# EAGLE board reader (EAGLE 7.1.0)
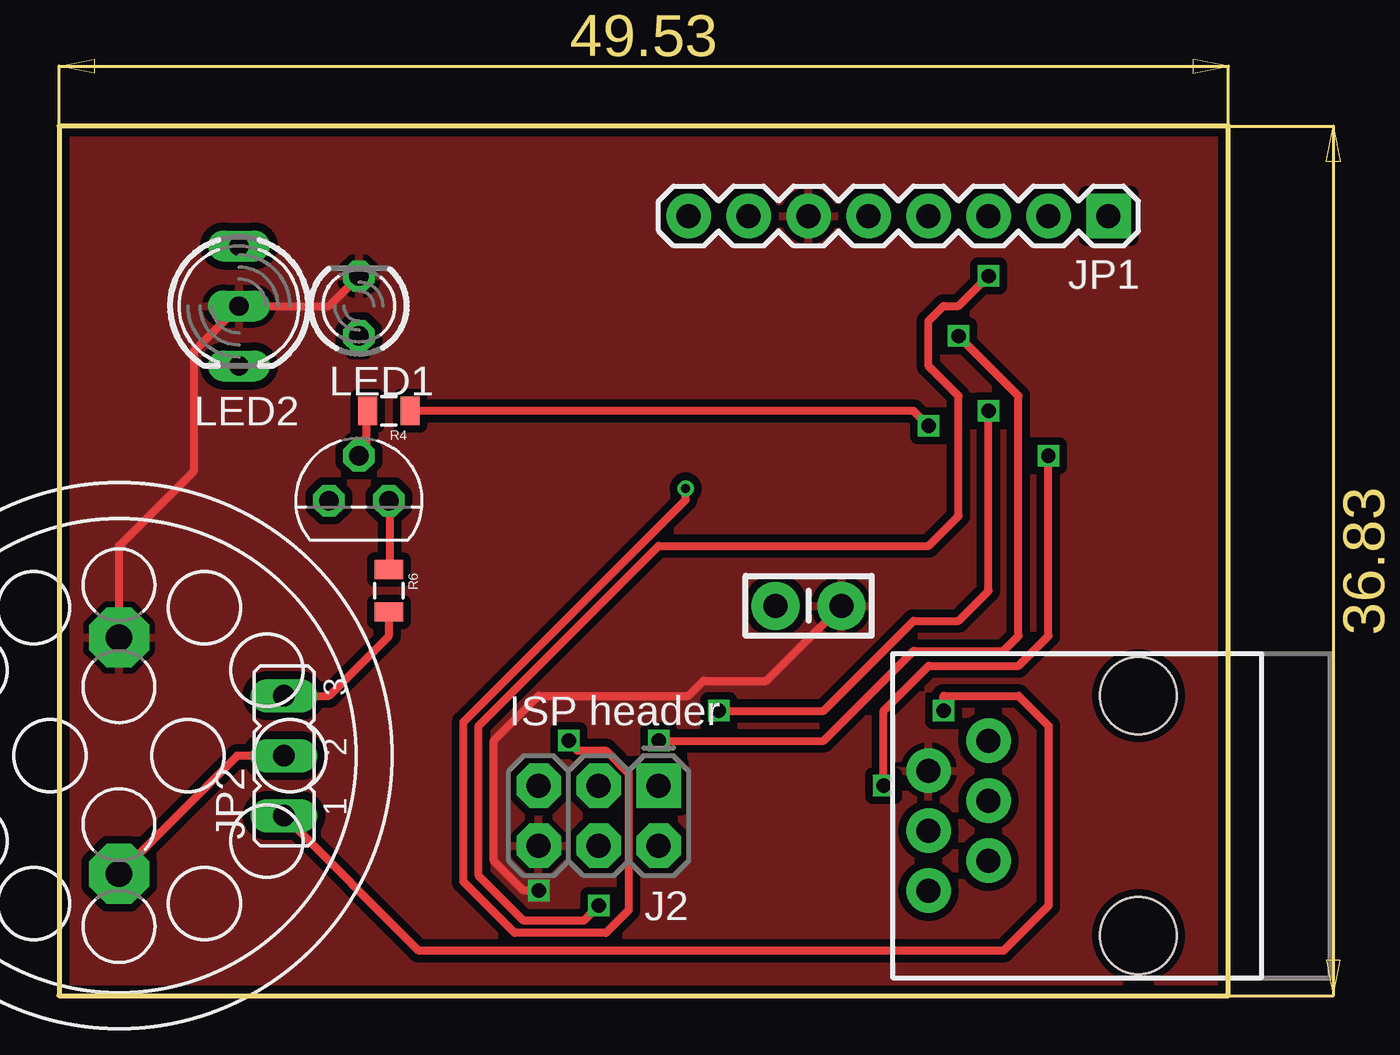
[diagram p0: board, top side]
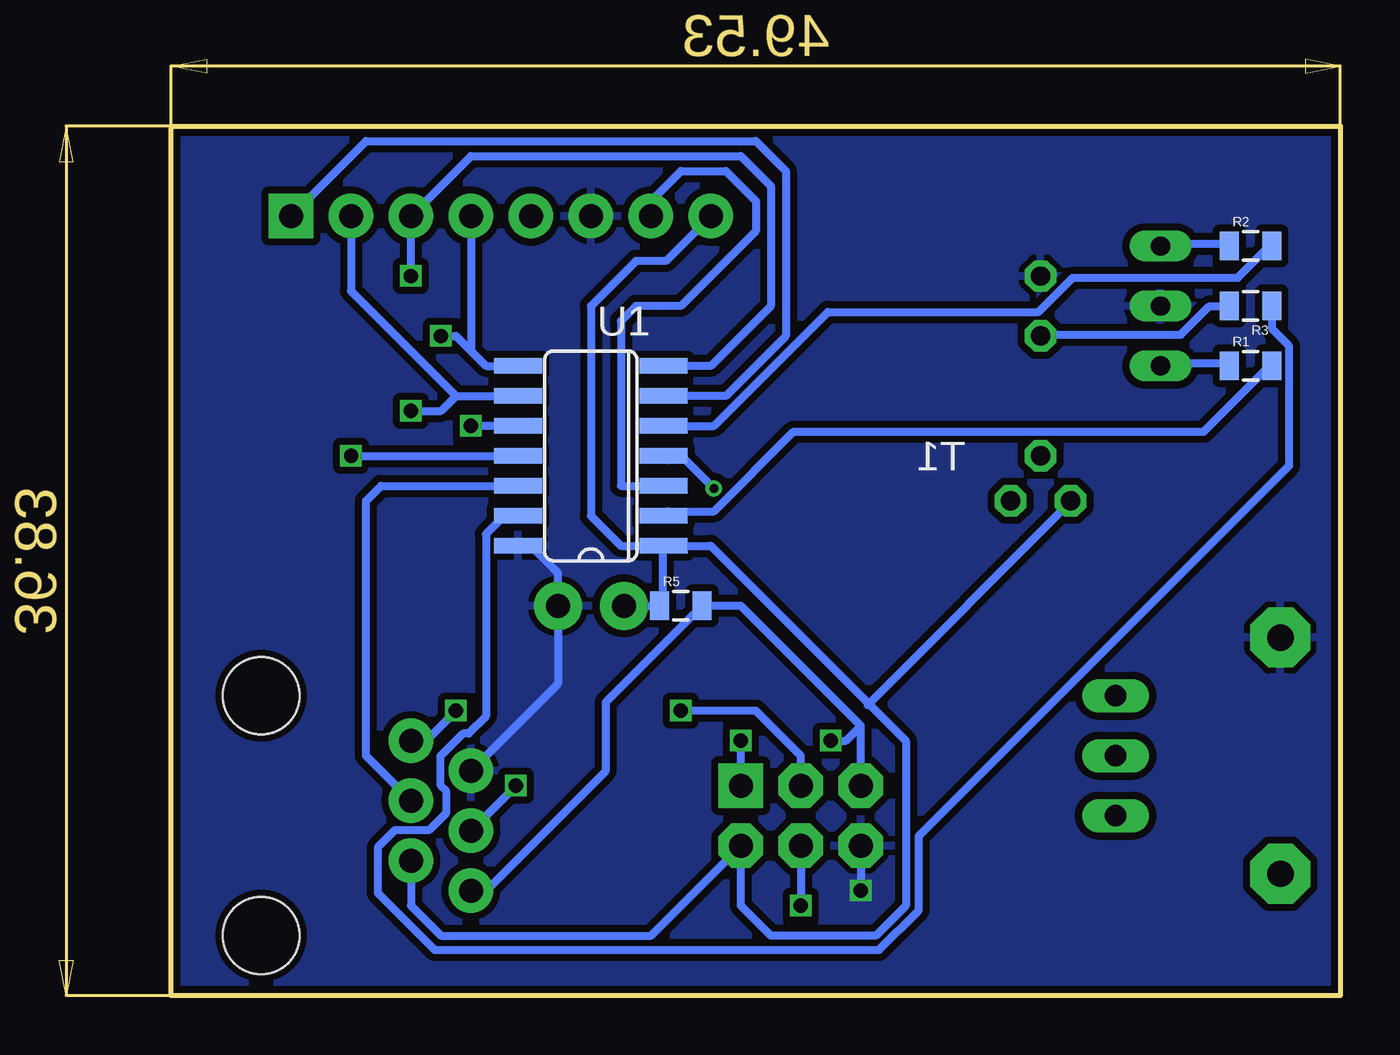
[diagram p1: board, bottom side, seen from below]

Size 49.53 x 36.83 mm. Coordinates in mm from the lower left corner, seen from the top.
Outline: 0,0 49.53,0 49.53,36.83 0,36.83 0,0
Copper layers (1*16): Top 0.035mm / dielectric 1.5mm / Bottom 0.035mm
Design rules "SeeedStudio_2layer_DRU_no_angle_20140221": minimum track width 6mil, minimum drill 12mil, track to track 6mil, track to pad 6mil, pad to pad 6mil, via to via 6mil, smd to smd 0mil, copper to edge 10mil, drill to drill 10mil, minimum pad ring 10mil, minimum via ring 6mil, stop-mask expansion 2mil, vias tented up to drill 100mil, thermal gap 10mil
Net classes: 0 default: width 0.33 mm, drill 0.381 mm

## Footprints (pad centres in the part's own frame; a part is rotated, then mirrored left to right if it is on the bottom)
CAP-PTH-SMALL-KIT = drill 1.016 pad 2.032: 1 -1.397,0; 2 1.397,0
RJ11-6 = drill 1.016 pad 1.88: 1 1.905,8.89; 2 3.175,6.35; 3 4.445,8.89; 4 5.715,6.35; 5 6.985,8.89; 6 8.255,6.35 | hole 3.251: 0,0; 10.16,0
2X3-NS = drill 1.016 pad 1.88 square: 1 -2.54,-1.27 | drill 1.016 pad 1.88 octagon: 2 -2.54,1.27; 3 0,-1.27; 4 0,1.27; 5 2.54,-1.27; 6 2.54,1.27
1X08 = drill 1.016 pad 1.88 square: 1 0,0 | drill 1.016 pad 1.88: 2 2.54,0; 3 5.08,0; 4 7.62,0; 5 10.16,0; 6 12.7,0; 7 15.24,0; 8 17.78,0
JP2 = drill 0.914 long: 1 -2.54,0; 2 0,0; 3 2.54,0
LED3MM = drill 0.813 octagon: A -1.27,0; K 1.27,0
DUOLED-C-5MM = drill 0.813 long: AR 2.54,0; AX -2.54,0; C 0,0
0805 = smd 0.8 x 1.2: 1 -0.9,0; 2 0.9,0
AL23P = drill 1.118 pad 2.54 octagon: 1 -5.004,0; 2 5.004,0
TO92 = drill 0.813 octagon: 1 1.27,0; 2 0,1.905; 3 -1.27,0
SO14 = smd 0.66 x 2.032: 1 -3.81,-3.073; 2 -2.54,-3.073; 3 -1.27,-3.073; 4 0,-3.073; 5 1.27,-3.073; 6 2.54,-3.073; 7 3.81,-3.073; 8 3.81,3.073; 9 2.54,3.073; 10 1.27,3.073; 11 0,3.073; 12 -1.27,3.073; 13 -2.54,3.073; 14 -3.81,3.073

## Placement (x,y rotation side)
C1  0.1uF  [CAP-PTH-SMALL-KIT]  31.75,16.51 0 top
J1  RJ11-6PTH  [RJ11-6]  45.72,2.54 90 top
J2  AVR_SPI_PRG_6NS  [2X3-NS]  22.86,7.62 180 top
JP1  MFRC522 Module  [1X08]  44.45,33.02 180 top
JP2  [JP2]  9.53,10.16 90 top
LED1  BLUE  [LED3MM]  12.7,29.21 90 top
LED2  STATUS  [DUOLED-C-5MM]  7.62,29.21 270 top
R1  360R  [0805]  3.81,26.67 0 bottom
R2  360R  [0805]  3.81,31.75 0 bottom
R3  680R  [0805]  3.81,29.21 180 bottom
R4  1K8  [0805]  13.97,24.77 180 top
R5  4K7  [0805]  27.94,16.51 0 bottom
R6  160R  [0805]  13.97,17.14 270 top
SP1  AL23P  [AL23P]  2.54,10.16 90 top
T1  BC547  [TO92]  12.7,20.95 0 top
U1  TINY841  [SO14]  31.75,22.86 90 bottom

## Library data of the parts
C1 = SparkFun-Capacitors; PROD_ID: CAP-08370
J1 J2 JP1 = SparkFun-Connectors
JP2 = jumper
LED1 LED2 = led
R1-R6 = SparkFun-Passives
SP1 = buzzer; OC_FARNELL: unknown; OC_NEWARK: unknown
T1 = transistor
U1 = attiny841

## Nets
BLUE_LED: R3.1 U1.13
CONTROLLER_RXD: J1.3 U1.11
CONTROLLER_TXD: J1.4 U1.12
EXT_SPEAKER: J1.6 JP2.1
GND: C1.2 J1.5 J2.6 JP1.6 LED1.K LED2.C SP1.2 U1.14
GREEN_LED: R2.2 U1.5
MISO: J2.1 JP1.4 U1.8
MOSI: J2.4 JP1.3 U1.7
N$1: JP2.2 SP1.1
N$2: LED2.AR R1.1
N$3: LED2.AX R2.1
N$4: R4.2 T1.2
N$5: R6.1 T1.1
N$6: LED1.A R3.2
N$7: JP2.3 R6.2
RDR_RESET: JP1.7 U1.3
RDR_SS: JP1.1 U1.6
RED_LED: R1.2 U1.2
RST: J1.1 J2.5 R5.2 U1.4
SCK: J2.3 JP1.2 U1.9
SPEAKER: R4.1 U1.10
VCC: C1.1 J1.2 J2.2 JP1.8 R5.1 T1.3 U1.1

## Tracks (layer width: path | path; a pad name or v marks a point on that pad's centre or on a via)
BLUE_LED
  Bottom 0.33: R3.1 2.9,29.2 2.9,28.23 2.17,27.51 2.17,22.44 17.86,6.76 17.86,3.62 19.55,1.93 38.37,1.93 40.78,4.34 40.78,6.27 40.06,7 38.61,7 37.88,7.72 37.88,8.69 38.12,8.93 38.12,10.13 37.16,11.1 36.92,11.1 36.2,11.82 36.2,19.55 35.47,20.27 34.99,20.27 U1.13
CONTROLLER_RXD  (via drill 0.6)
  Top 0.33: v34.92,8.89 34.92,12.06 36.83,13.97 40.64,13.97 41.91,15.24 v41.91,22.86
  Bottom 0.33: J1.3 v34.92,8.89 | v41.91,22.86 U1.11
CONTROLLER_TXD
  Bottom 0.33: J1.4 41.27,10.16 41.27,20.95 40.64,21.59 U1.12
EXT_SPEAKER  (via drill 0.6)
  Top 0.33: v37.47,12.06 37.47,12.7 40.64,12.7 41.91,11.43 41.91,3.81 40.01,1.91 15.24,1.91 JP2.1
  Bottom 0.33: J1.6 38.73,10.79 v37.47,12.06
GND  (via drill 0.6)
  Top 0.33: v20.32,4.45 19.68,4.45 18.41,5.71 18.41,10.79 20.32,12.7 26.67,12.7 27.3,13.34 29.97,13.34 C1.2 | SP1.2 2.54,19.05 5.71,22.23 5.71,27.3 LED2.C 11.43,29.21 LED1.K
  Bottom 0.33: U1.14 34.29,19.05 33.15,17.91 C1.2 33.15,13.21 J1.5 | J2.6 v20.32,4.45
  pour Bottom (isolate 0.305): 0,36.83 49.53,36.83 49.53,0 0,0
  pour Top (isolate 0.33): 0,36.83 49.53,36.83 49.53,0 0,0
GREEN_LED
  Bottom 0.33: U1.5 26.54,24.13 21.72,28.96 12.79,28.96 11.34,30.4 4.34,30.4 3.14,31.61 R2.2
MISO  (via drill 0.6)
  Top 0.33: v38.1,27.94 40.64,25.4 40.64,15.24 40.01,14.61 36.2,14.61 32.38,10.79 v25.4,10.79
  Bottom 0.33: JP1.4 36.83,27.3 | 36.83,27.3 36.2,26.67 U1.8 | J2.1 v25.4,10.79 | v38.1,27.94 37.47,27.94 36.83,27.3
MOSI  (via drill 0.6)
  Top 0.33: v22.86,3.81 22.23,3.17 19.68,3.17 17.78,5.08 17.78,11.43 25.4,19.05 36.83,19.05 38.1,20.32 38.1,25.4 36.83,26.67 36.83,28.57 37.47,29.21 38.1,29.21 v39.37,30.48
  Bottom 0.33: U1.7 26.67,26.67 24.13,29.21 24.13,34.29 25.4,35.56 36.83,35.56 JP1.3 v39.37,30.48 | J2.4 v22.86,3.81
N$1
  Top 0.33: JP2.2 7.54,10.16 SP1.1
N$2
  Bottom 0.33: R1.1 4.83,26.78 7.48,26.78 LED2.AR
N$3
  Bottom 0.33: R2.1 4.83,31.85 7.48,31.85 LED2.AX
N$4
  Top 0.33: R4.2 13.03,24.61 13.03,23.16 12.79,22.92 T1.2
N$5
  Top 0.33: R6.1 13.99,18.1 13.99,20.75 T1.1
N$6
  Bottom 0.33: R3.2 4.83,29.2 5.55,29.2 6.76,27.99 12.55,27.99 LED1.A
N$7
  Top 0.33: JP2.3 11.43,12.7 13.97,15.24 R6.2
RDR_RESET
  Bottom 0.33: JP1.7 29.21,33.66 27.94,34.92 26.04,34.92 24.77,33.66 24.77,32.38 27.94,29.21 29.84,29.21 30.48,28.57 30.48,21.59 U1.3
RDR_SS
  Bottom 0.33: JP1.1 41.27,36.2 24.77,36.2 23.5,34.92 23.5,27.94 26.04,25.4 U1.6
RED_LED
  Bottom 0.33: R1.2 3.14,26.54 5.79,23.89 23.16,23.89 26.54,20.51 28.47,20.51 U1.2
RST  (via drill 0.38, 0.6)
  Top 0.33: v26.54,21.48 26.54,20.99 17.13,11.58 17.13,4.83 19.3,2.65 23.16,2.65 24.13,3.62 24.13,9.41 23.16,10.38 21.96,10.38 21.96,10.43 v21.59,10.79
  Bottom 0.33: J1.1 36.2,4.45 31.11,9.53 31.11,12.44 R5.2 25.4,16.51 20.32,11.43 | J2.5 20.32,11.43 | v26.54,21.48 27.75,22.68 28.47,22.68 U1.4 | v21.59,10.79 20.95,10.79 20.32,11.43
SCK  (via drill 0.6)
  Top 0.33: v27.94,12.06 32.38,12.06 36.2,15.88 38.1,15.88 39.37,17.14 v39.37,24.77
  Bottom 0.33: JP1.2 41.91,29.84 37.47,25.4 | 37.47,25.4 U1.9 | J2.3 22.86,10.16 24.77,12.06 v27.94,12.06 | v39.37,24.77 38.1,24.77 37.47,25.4
SPEAKER  (via drill 0.6)
  Top 0.33: v36.83,24.13 36.2,24.77 R4.1
  Bottom 0.33: U1.10 v36.83,24.13
VCC
  Bottom 0.33: C1.1 R5.1 28.71,16.65 28.71,18.82 U1.1 | J1.2 39.37,3.81 38.1,2.54 29.21,2.54 J2.2 25.4,3.81 24.13,2.54 19.68,2.54 18.41,3.81 18.41,10.79 19.98,12.36 | U1.1 26.67,19.05 19.98,12.36 | JP1.8 28.57,31.11 29.84,31.11 31.75,29.21 31.75,20.32 30.48,19.05 U1.1 | 19.98,12.36 11.58,20.75 T1.3 | 20.03,12.31 19.98,12.36

## Text on the board
tNames: LED2 | ISP header
tValues: Status | Read
bValues: * *-* internal / *-* * external